# Altium PCB Jukebox PCB.PCBDOC (part 1 of 3)
Units mil, origin at the board's own origin, x right, y up, seen from the top; angles counter-clockwise.
Board outline 8310.03 x 5810.03 mil, 2 copper layers (Top Layer, Bottom Layer); 100 components, 181 nets, 737 pads, 268 vias.
Unrouted connection lines stored in the file: 109.
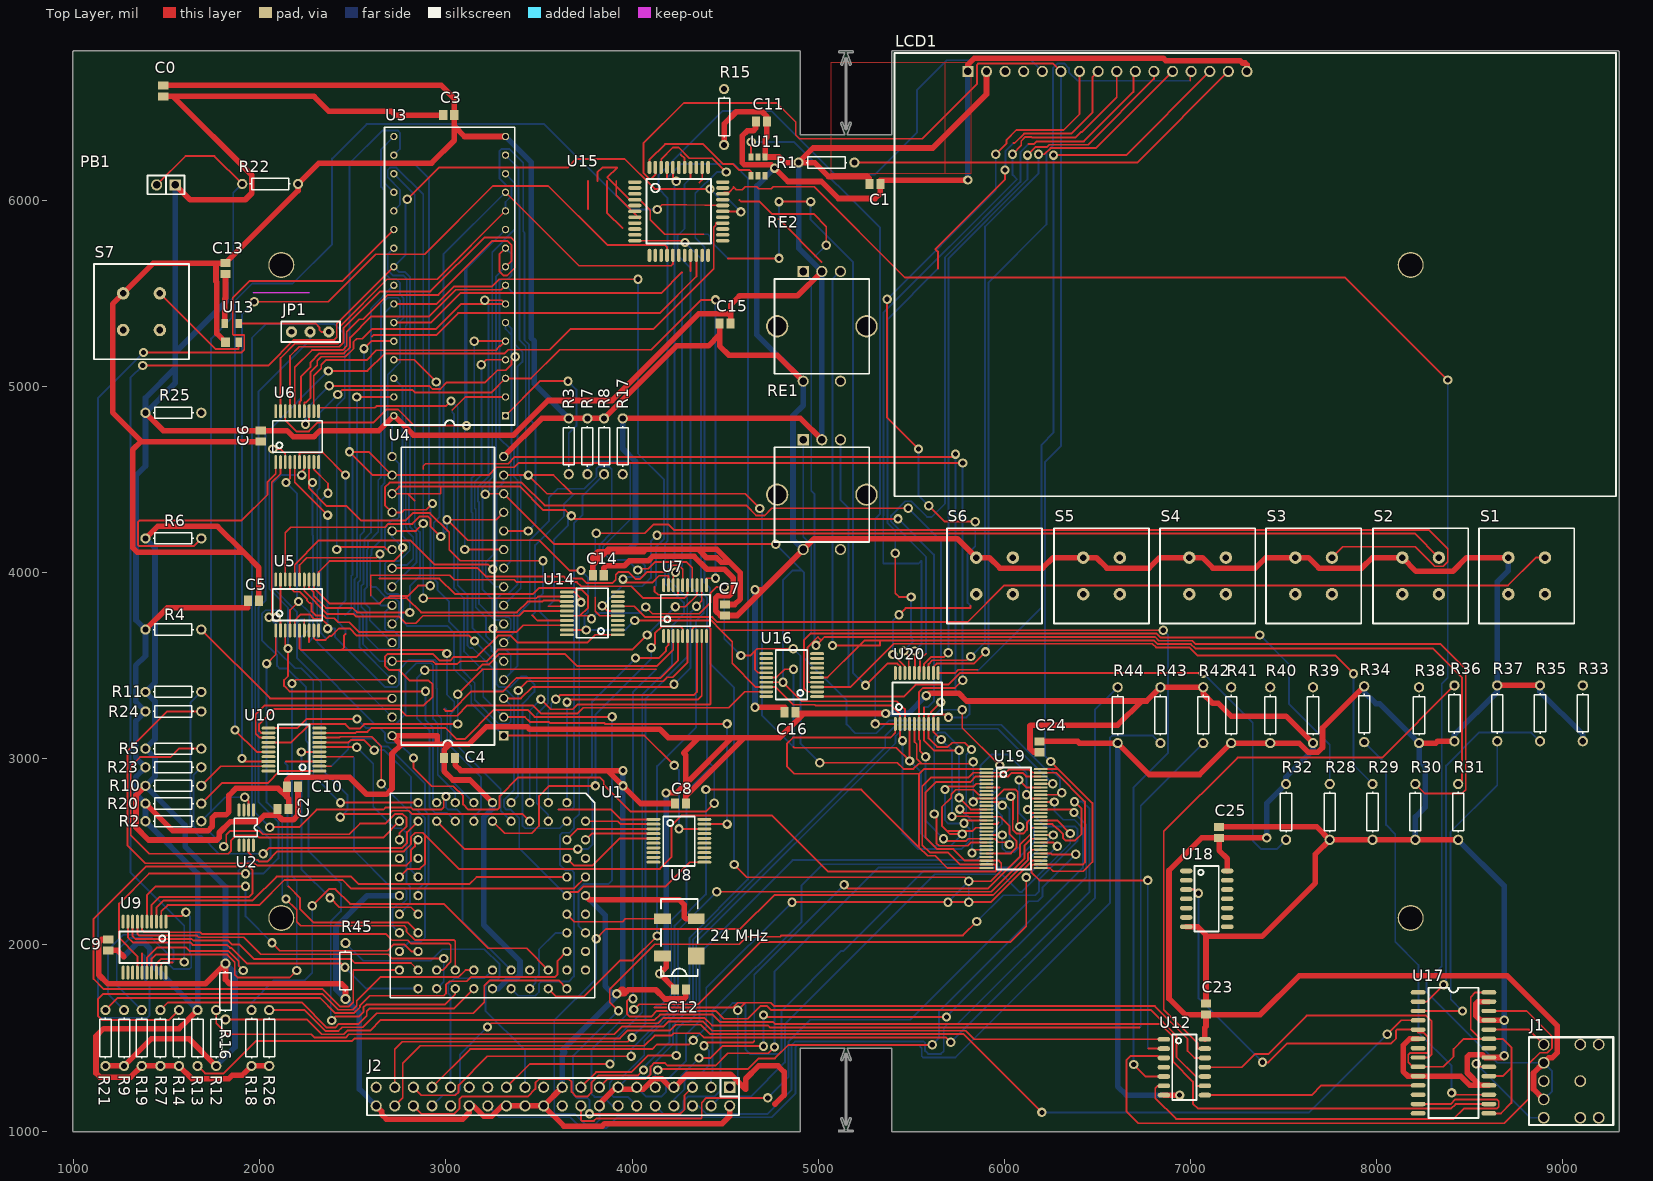
[diagram p0: Top Layer view]
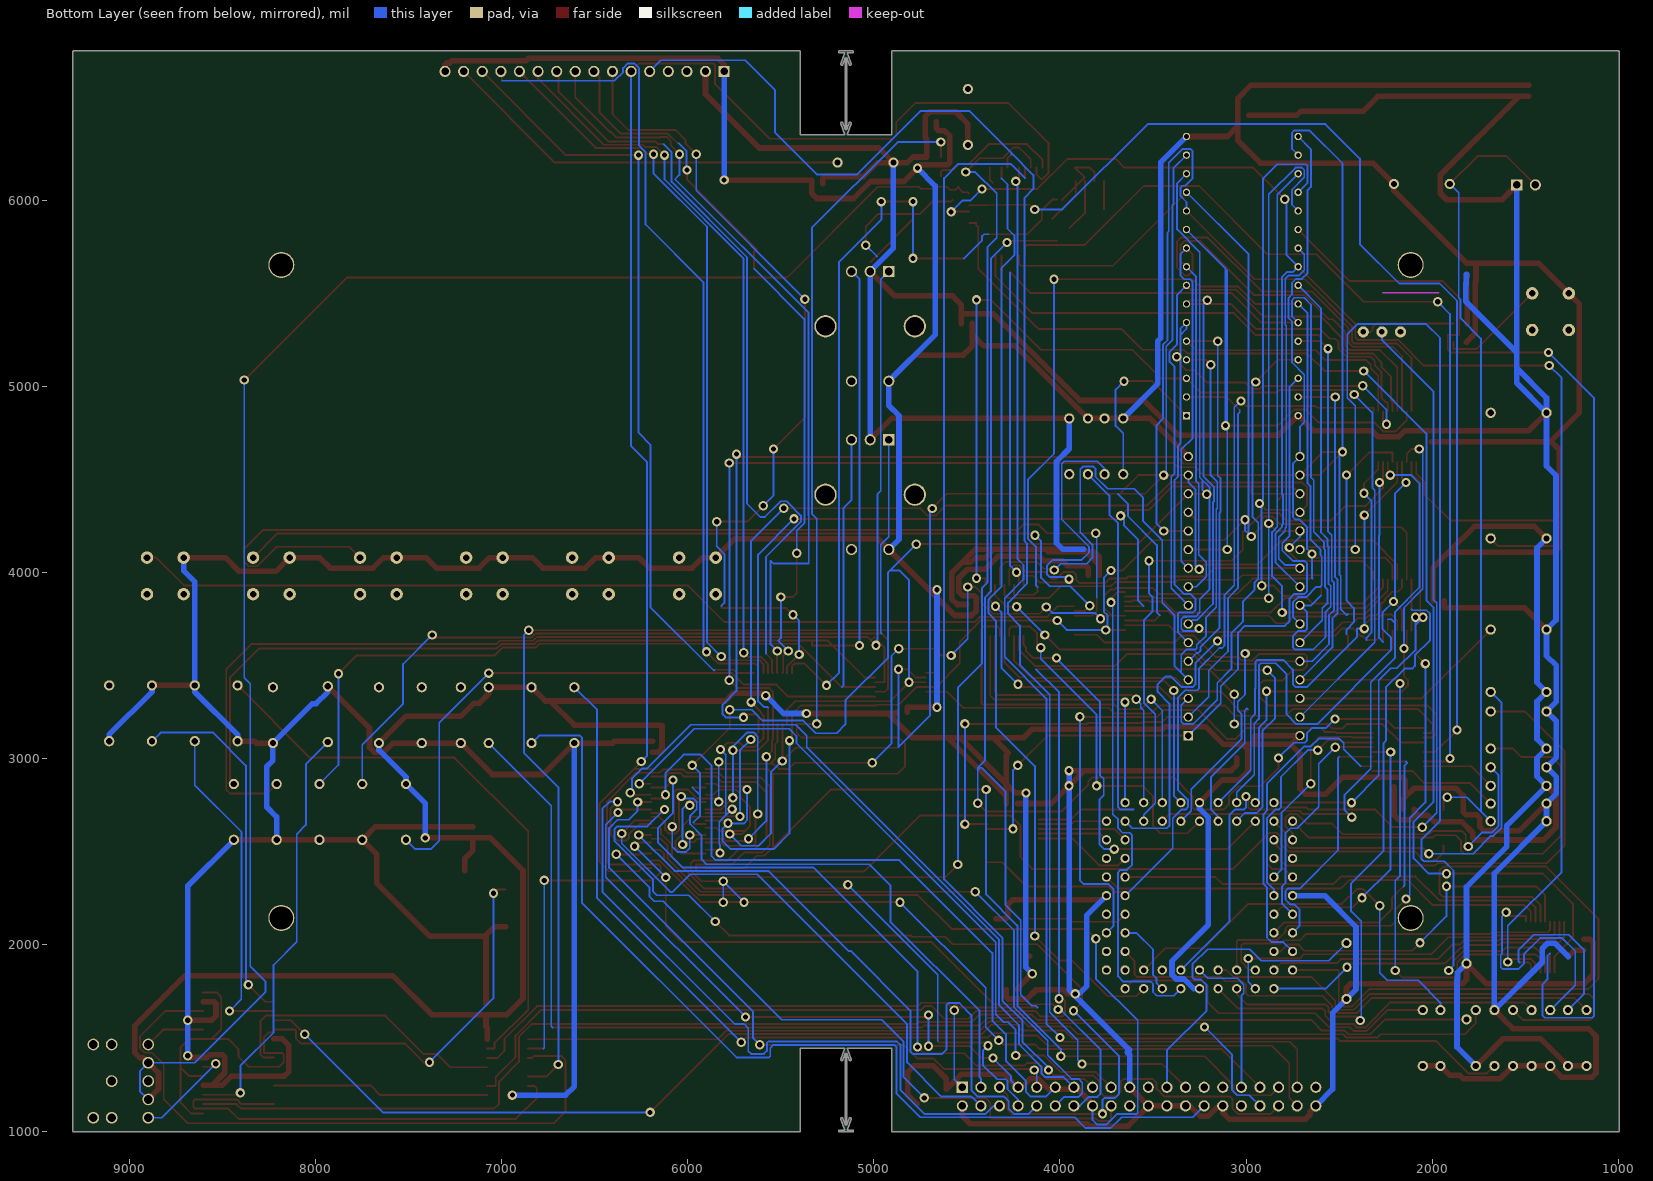
[diagram p1: Bottom Layer view, seen from below]

## Layer stack, top to bottom
Top Solder: solder mask 0.4, Solder Resist, Dk 3.5
Top Layer: signal copper 1.4
Dielectric1: dielectric 12.6, FR-4, Dk 4.8
Bottom Layer: signal copper 1.4
Bottom Solder: solder mask 0.4, Solder Resist, Dk 3.5

## Board outline
1000,994.99 cw(c1000,1000) 994.99,1000 994.99,6800 cw(c1000,6800) 1000,6805.02 4900,6805.02 cw(c4900,6800) 4905.02,6800 4905.02,6355.02 5143.04,6355.02 5122.95,6415.29 cw(c5127.71,6416.87) 5132.47,6418.46 5144.98,6380.9 5144.98,6769.1 5132.47,6731.54 cw(c5127.71,6733.13) 5122.95,6734.71 5143.04,6794.98 5115,6794.98 cw(c5115,6800) 5115,6805.02 5185,6805.02 cw(c5185,6800) 5190.02,6800 cw(c5185,6800) 5185,6794.98 5156.96,6794.98 5177.05,6734.71 cw(c5172.29,6733.13) 5177.31,6733.13 cw(c5172.29,6733.13) 5167.53,6731.54 5155.02,6769.1 5155.02,6380.9 5167.53,6418.46 cw(c5172.29,6416.87) 5177.31,6416.87 cw(c5172.29,6416.87) 5177.05,6415.29 5156.96,6355.02 5394.98,6355.02 5394.98,6800 cw(c5400,6800) 5400,6805.02 9300,6805.02 cw(c9300,6800) 9305.01,6800 9305.01,1000 cw(c9300,1000) 9300,994.99 5400,994.99 cw(c5400,1000) 5394.98,1000 5394.98,1444.98 5156.96,1444.98 5177.05,1384.71 cw(c5172.29,1383.13) 5177.31,1383.13 cw(c5172.29,1383.13) 5167.53,1381.54 5155.02,1419.1 5155.02,1030.9 5167.53,1068.46 cw(c5172.29,1066.87) 5177.31,1066.87 cw(c5172.29,1066.87) 5177.05,1065.29 5156.96,1005.01 5185,1005.01 cw(c5185,1000) 5190.02,1000 cw(c5185,1000) 5185,994.99 5115,994.99 cw(c5115,1000) 5115,1005.01 5143.04,1005.01 5122.95,1065.29 cw(c5127.71,1066.87) 5132.47,1068.46 5144.98,1030.9 5144.98,1419.1 5132.47,1381.54 cw(c5127.71,1383.13) 5122.95,1384.71 5143.04,1444.98 4905.02,1444.98 4905.02,1000 cw(c4900,1000) 4900,994.99

## Design rules (kind name [scope] priority, off if disabled: settings)
Clearance Clearance_9 [IsSMTPin vs IsFill] p1: gap=7.9
Clearance Clearance_8 [IsSMTPin vs IsVia] p2: gap=7.9
Clearance Clearance_7 [IsSMTPin vs IsSMTPin] p3: gap=7.8
Clearance Clearance_6 [IsThruPin vs IsFill] p4: gap=7.9
Clearance Clearance_5 [IsThruPin vs IsVia] p5: gap=7.9
Clearance Clearance_4 [IsThruPin vs IsSMTPin] p6: gap=7.8
Clearance Clearance_3 [IsThruPin vs IsThruPin] p7: gap=7.8
Clearance Clearance_2 [IsWire vs IsSMTPin] p8: gap=7.9
Clearance Clearance_1 [IsWire vs IsThruPin] p9: gap=7.9
Clearance [All] p10: gap=8
FabricationTestPointUsage TestPointUsage [All] p1: valid=0 allowmultiple=FALSE
FabricationTestpoint Testpoint [All] p1: side=3 testpointundercomponent=TRUE minsize=40 maxsize=100 preferedsize=60 minholesize=0 maxholesize=40 preferedholesize=32 testpointgrid=1 allowsidetop=TRUE allowsidebottom=TRUE usegrid=TRUE gridtolerance=0.01
PlaneClearance [All] p1: clearance=10
PolygonConnect [All] p1: connectstyle=Relief reliefconductorwidth=10 reliefentries=4 polygonreliefangle="90 Angle" airgapwidth=10
RoomDefinition "Jukebox Schematic" [InComponentClass('Jukebox Schematic')] p1: confinementstyle=ConfineIn formatcopy=TRUE lockcomponents=FALSE outline 315,7095 12655,7095 12655,8815 315,8815
RoutingVias [All] p1: holewidth=28 width=50 viastyle="Through Hole" minholewidth=28 minwidth=50 maxholewidth=28 maxwidth=50
SolderMaskExpansion [All] p1: expansion=2
UnpouredPolygon [All] p1: allowunpoured=FALSE
Width "Schematic Width Constraint_1" [InNet('GND')] p1: maxlimit=30 minlimit=8 preferedwidth=30
Width "Schematic Width Constraint" [InNet('VCC')] p2: maxlimit=30 minlimit=8 preferedwidth=30
Width [All] p3: maxlimit=10 minlimit=10 preferedwidth=10
26 further rules are at their usual default settings.

## Components (designator, comment, footprint, x,y, rotation, side; value= is the part's Value field where it differs from the comment)
"24 MHz" "SG-636PCE" SG636PCE 4345,1940 r90 top
C0 "Cap Pol3" C0805 1480,6590 r90 top
C1 "Cap Pol3" C0805 5305,6090 r0 top
C2 "Cap Pol3" C0805 2125,2730 r180 top
C3 "Cap Pol3" C0805 3015,6460 r0 top
C4 "Cap Pol3" C0805 3020,3005 r0 top
C5 "Cap Pol3" C0805 1965,3850 r0 top
C6 "Cap Pol3" C0805 2005,4735 r270 top
C7 "Cap Pol3" C0805 4500,3800 r270 top
C8 "Cap Pol3" C0805 4260,2760 r180 top
C9 "Cap Pol3" C0805 1185,2000 r90 top
C10 "Cap Pol3" C0805 2175,2850 r0 top
C11 "Cap Pol3" C0805 4695,6425 r180 top
C12 "Cap Pol3" C0805 4260,1760 r0 top
C13 "Cap Pol3" C0805 1815,5635 r90 top
C14 "Cap Pol3" C0805 3818.62,3987.05 r0 top
C15 "Cap Pol3" C0805 4500,5340 r180 top
C16 "Cap Pol3" C0805 4850,3250 r180 top
C23 "Cap Pol3" C0805 7085,1655 r90 top
C24 "Cap Pol3" C0805 6190,3065 r90 top
C25 "Cap Pol3" C0805 7155,2605 r90 top
J1 "PHONEJACK STEREO SW" SJ1-352 8900,1465 r0 top
J2 "IDE40" SIP2X20 4525,1235 r180 top
JP1 "3P_JP" 3P_JP 2370,5295 r180 top
LCD1 "NHD-0420DZ-FSW-FBW" 20x4Disp 5805,6695 r0 top
PB1 "SWITCH-PBNC" SIP2 1545,6085 r180 top
R1 "Res1" AXIAL-0.3 5045,6205 r180 top
R2 "Res1" AXIAL-0.3 1535,2665 r0 top
R3 "Res1" AXIAL-0.3 3660,4680 r270 top
R4 "Res1" AXIAL-0.3 1535,3695 r180 top
R5 "Res1" AXIAL-0.3 1535,3055 r0 top
R6 "Res1" AXIAL-0.3 1535,4185 r0 top
R7 "Res1" AXIAL-0.3 3760,4680 r270 top
R8 "Res1" AXIAL-0.3 3850,4680 r270 top
R9 "Res1" AXIAL-0.3 1270,1500 r90 top
R10 "Res1" AXIAL-0.3 1535,2855 r0 top
R11 "Res1" AXIAL-0.3 1535,3360 r0 top
R12 "Res1" AXIAL-0.3 1765,1500 r90 top
R13 "Res1" AXIAL-0.3 1665,1500 r90 top
R14 "Res1" AXIAL-0.3 1565,1500 r90 top
R15 "Res1" AXIAL-0.3 4495,6450 r90 top
R16 "Res1" AXIAL-0.3 1815,1750 r90 top
R17 "Res1" AXIAL-0.3 3950,4680 r270 top
R18 "Res1" AXIAL-0.3 1955,1500 r90 top
R19 "Res1" AXIAL-0.3 1365,1500 r90 top
R20 "Res1" AXIAL-0.3 1535,2760 r0 top
R21 "Res1" AXIAL-0.3 1170,1500 r90 top
R22 "Res1" AXIAL-0.3 2055,6090 r180 top
R23 "Res1" AXIAL-0.3 1535,2955 r0 top
R24 "Res1" AXIAL-0.3 1535,3255 r0 top
R25 "Res1" AXIAL-0.3 1535,4860 r0 top
R26 "Res1" AXIAL-0.3 2050,1500 r90 top
R27 "Res1" AXIAL-0.3 1465,1500 r90 top
R28 "Res1" AXIAL-0.3 7750,2715 r90 top
R29 "Res1" AXIAL-0.3 7980,2715 r90 top
R30 "Res1" AXIAL-0.3 8210,2715 r90 top
R31 "Res1" AXIAL-0.3 8440,2715 r90 top
R32 "Res1" AXIAL-0.3 7515,2715 r90 top
R33 "Res1" AXIAL-0.3 9110,3245 r90 top
R34 "Res1" AXIAL-0.3 7935,3240 r90 top
R35 "Res1" AXIAL-0.3 8880,3245 r90 top
R36 "Res1" AXIAL-0.3 8420,3245 r90 top
R37 "Res1" AXIAL-0.3 8650,3245 r90 top
R38 "Res1" AXIAL-0.3 8230,3235 r90 top
R39 "Res1" AXIAL-0.3 7660,3235 r90 top
R40 "Res1" AXIAL-0.3 7430,3235 r90 top
R41 "Res1" AXIAL-0.3 7220,3235 r90 top
R42 "Res1" AXIAL-0.3 7070,3235 r90 top
R43 "Res1" AXIAL-0.3 6840,3235 r90 top
R44 "Res1" AXIAL-0.3 6610,3235 r90 top
R45 "Res1" AXIAL-0.3 2460,1860 r90 top
RE1 "SW-ROTARY&PB" ROTENCPB 4920,4715 r0 top
RE2 "SW-ROTARY&PB" ROTENCPB 4920,5620 r0 top
S1 "SW-PB" PB_EG4791 8710,3885 r0 top
S2 "SW-PB" PB_EG4791 8140,3885 r0 top
S3 "SW-PB" PB_EG4791 7565,3885 r0 top
S4 "SW-PB" PB_EG4791 6995,3885 r0 top
S5 "SW-PB" PB_EG4791 6425,3885 r0 top
S6 "SW-PB" PB_EG4791 5850,3885 r0 top
S7 "SW-PB" PB_EG4791 1265,5305 r0 top
U1 "80C188XL" PLCCS68I 3750,2765 r270 top
U2 "MAX709" UMAX8 1965,2725 r270 top
U3 "AM28F020-200PC" DIPS32 3320,4845 r180 top
U4 "HM628128B" DIP32 3310,3125 r180 top
U5 "74ALS245" SSOP20 2085,3690 r0 top
U6 "74ALS573" SSOP20 2085,4595 r0 top
U7 "74ALS245" SSOP20 4170,3660 r0 top
U8 "74ALS573" SSOP20 4115,2675 r270 top
U9 "74ALS245" SSOP20 1495,2125 r180 top
U10 "74ALS245" SSOP20 2320,2935 r90 top
U11 "MCP4013" SOT-23-6 4715,6235 r180 top
U12 "74LCX125" "SOIC 14" 6825,1180 r0 top
U13 "MAX6816" SOT-143 1815,5240 r0 top
U14 "MAX6818" SSOP20 3923.62,3667.05 r90 top
U15 "ISPLSI1016" TQFP44 4015,6100 r0 top
U16 "74ALS245" SSOP20 4995,3335 r90 top
U17 "VS1011E" SOL-28 8225,1745 r0 top
U18 "74LCX125" "SOIC 14" 6945,2085 r0 top
U19 "74FCT16646" TSSOP56 5905,2945 r270 top
U20 "74ALS245" SSOP20 5415,3188 r0 top

## Footprints (in the part's own frame and the unit in brackets; to place one, negate y for a bottom-side part, rotate by r counter-clockwise, add the part's x,y. Pads: shape width x height; smd on the part's side, far side on the other; paste and mask are expansions set on the pad)
3P_JP [mil]
  round 60 hole 30: 1(0,0) 2(100,0) 3(200,0)
  silkscreen extent -60,-55 255,55
20x4Disp [mil]
  rect 60x60 hole 40: 1(0,0)
  round 60 hole 40: 2(100,0) 3(200,0) 4(300,0) 5(400,0) 6(500,0) 7(600,0) 8(700,0) 9(800,0) 10(900,0) 11(1000,0) 12(1100,0) 13(1200,0) 14(1300,0) 15(1400,0) 16(1500,0)
  silkscreen extent -394,-2283 3484,98
AXIAL-0.3 [mm] "Axial Device, Thru-Hole; 2 Leads; 0.3 in Pin Spacing"
  round 1.4 hole 0.85: 1(-3.81,0) 2(3.81,0)
  silkscreen extent -2.77,-0.76 2.77,0.76
C0805 [mm] "Chip Capacitor, Body 2.0x1.3mm, IPC High Density"
  rect 1.1x1.4 smd: 1(-0.75,0) 2(0.75,0)
  body extent -1.1,-0.72 1.1,0.72, height 1.4
DIP32 [mil]
  rect 50x50 hole 35: 1(0,0)
  round 50 hole 35: 2(0,-100) 3(0,-200) 4(0,-300) 5(0,-400) 6(0,-500) 7(0,-600) 8(0,-700) 9(0,-800) 10(0,-900) 11(0,-1000) 12(0,-1100) 13(0,-1200) 14(0,-1300) 15(0,-1400) 16(0,-1500) 17(600,-1500) 18(600,-1400) 19(600,-1300) 20(600,-1200) 21(600,-1100) 22(600,-1000) 23(600,-900) 24(600,-800) 25(600,-700) 26(600,-600) 27(600,-500) 28(600,-400) 29(600,-300) 30(600,-200) 31(600,-100) 32(600,0)
  silkscreen extent 50,-1550 550,50
DIPS32 [mil]
  rect 40x40 hole 25: 1(0,0)
  round 40 hole 25: 2(0,-100) 3(0,-200) 4(0,-300) 5(0,-400) 6(0,-500) 7(0,-600) 8(0,-700) 9(0,-800) 10(0,-900) 11(0,-1000) 12(0,-1100) 13(0,-1200) 14(0,-1300) 15(0,-1400) 16(0,-1500) 17(600,-1500) 18(600,-1400) 19(600,-1300) 20(600,-1200) 21(600,-1100) 22(600,-1000) 23(600,-900) 24(600,-800) 25(600,-700) 26(600,-600) 27(600,-500) 28(600,-400) 29(600,-300) 30(600,-200) 31(600,-100) 32(600,0)
  silkscreen extent -50,-1550 650,50
PB_EG4791 [mm]
  round 1.7 hole 0.9: 1(0,5) 2(5,5) 3(0,0) 4(5,0)
  silkscreen extent -4,-4 9,9
PLCCS68I [mil]
  round 50 hole 30: 1(0,-100) 2(100,-100) 3(0,-200) 4(100,-200) 5(0,-300) 6(100,-300) 7(0,-400) 8(100,-400) 9(0,-500) 10(100,-500) 11(0,-600) 12(100,-600) 13(0,-700) 14(100,-700) 15(0,-800) 16(100,-800) 17(0,-900) 18(100,-1000) 19(100,-900) 20(200,-1000) 21(200,-900) 22(300,-1000) 23(300,-900) 24(400,-1000) 25(400,-900) 26(500,-1000) 27(500,-900) 28(600,-1000) 29(600,-900) 30(700,-1000) 31(700,-900) 32(800,-1000) 33(800,-900) 34(900,-1000) 35(1000,-900) 36(900,-900) 37(1000,-800) 38(900,-800) 39(1000,-700) 40(900,-700) 41(1000,-600) 42(900,-600) 43(1000,-500) 44(900,-500) 45(1000,-400) 46(900,-400) 47(1000,-300) 48(900,-300) 49(1000,-200) 50(900,-200) 51(1000,-100) 52(900,0) 53(900,-100) 54(800,0) 55(800,-100) 56(700,0) 57(700,-100) 58(600,0) 59(600,-100) 60(500,0) 61(500,-100) 62(400,0) 63(400,-100) 64(300,0) 65(300,-100) 66(200,0) 67(200,-100) 68(100,0)
  silkscreen extent -50,-1050 1050,50
ROTENCPB [mil]
  rect 60x60 hole 42: 1(0,0)
  round 60 hole 42: 2(100,0) 3(200,0) 4(200,-590) 5(0,-590)
  round 120 hole 100: ""(-140,-295) ""(340,-295)
  silkscreen extent -155,-550 355,-40
SG636PCE [mm]
  rect 2.3x2.3 smd: 1(0,0)
  rect 1.5x2.3 smd: 2(5.1,0) 3(5.1,4.6) 4(0,4.6)
  silkscreen extent -2.7,-0.2 7.8,4.8
SIP2 [mil]
  rect 60x60 hole 40: 1(0,0)
  round 60 hole 40: 2(100,0)
  silkscreen extent -50,-50 150,50
SIP2X20 [mil]
  rect 60x60 hole 40: 1(0,0)
  round 60 hole 40: 2(0,100) 3(100,0) 4(100,100) 5(200,0) 6(200,100) 7(300,0) 8(300,100) 9(400,0) 10(400,100) 11(500,0) 12(500,100) 13(600,0) 14(600,100) 15(700,0) 16(700,100) 17(800,0) 18(800,100) 19(900,0) 20(900,100) 21(1000,0) 22(1000,100) 23(1100,0) 24(1100,100) 25(1200,0) 26(1200,100) 27(1300,0) 28(1300,100) 29(1400,0) 30(1400,100) 31(1500,0) 32(1500,100) 33(1600,0) 34(1600,100) 35(1700,0) 36(1700,100) 37(1800,0) 38(1800,100) 39(1900,0) 40(1900,100)
  silkscreen extent -50,-50 1950,150
SJ1-352 [mm]
  round 1.6 hole 1.2: A(0,-10) B(0,-7.5) C(0,-2.5) D(0,0) E(5,-5) ""(0,-5) ""(5,-10) ""(5,0) ""(7.5,-10) ""(7.5,0)
  silkscreen extent -2,-11 9.5,1
"SOIC 14" [mm]
  oval 1.7x0.65 smd: 1(0.85,7.945) 2(0.85,6.675) 3(0.85,5.405) 4(0.85,4.135) 5(0.85,2.865) 6(0.85,1.595) 7(0.85,0.325) 8(6.45,0.325) 9(6.45,1.595) 10(6.45,2.865) 11(6.45,4.135) 12(6.45,5.405) 13(6.45,6.675) 14(6.45,7.945)
  silkscreen extent 2,-0.33 5.3,8.6
SOL-28 [mil]
  oval 80x24 smd: 1(0,0) 2(0,-50) 3(0,-100) 4(0,-150) 5(0,-200) 6(0,-250) 7(0,-300) 8(0,-350) 9(0,-400) 10(0,-450) 11(0,-500) 12(0,-550) 13(0,-600) 14(0,-650) 15(380,-650) 16(380,-600) 17(380,-550) 18(380,-500) 19(380,-450) 20(380,-400) 21(380,-350) 22(380,-300) 23(380,-250) 24(380,-200) 25(380,-150) 26(380,-100) 27(380,-50) 28(380,0)
  silkscreen extent 55,-675 325,25
SOT-23-6 [mil]
  rect 26x40 smd: 1(0,0) 2(37.5,0) 3(75,0) 4(75,102) 5(37.5,102) 6(0,102)
SOT-143 [mil]
  rect 50x50 smd: 1(0,0)
  rect 35x50 smd: 2(70,0) 3(70,100) 4(-5,100)
SSOP20 [mm]
  oval 0.4x1.9 smd: 1(0,0) 2(0.65,0) 3(1.3,0) 4(1.95,0) 5(2.6,0) 6(3.25,0) 7(3.9,0) 8(4.55,0) 9(5.2,0) 10(5.85,0) 11(5.85,6.95) 12(5.2,6.95) 13(4.55,6.95) 14(3.9,6.95) 15(3.25,6.95) 16(2.6,6.95) 17(1.95,6.95) 18(1.3,6.95) 19(0.65,6.95) 20(0,6.95)
  silkscreen extent -0.4,1.35 6.35,5.65
TQFP44 [mm]
  oval 1.8x0.5 smd: 1(0,0) 2(0,-0.8) 3(0,-1.6) 4(0,-2.4) 5(0,-3.2) 6(0,-4) 7(0,-4.8) 8(0,-5.6) 9(0,-6.4) 10(0,-7.2) 11(0,-8) 23(12,-8) 24(12,-7.2) 25(12,-6.4) 26(12,-5.6) 27(12,-4.8) 28(12,-4) 29(12,-3.2) 30(12,-2.4) 31(12,-1.6) 32(12,-0.8) 33(12,0)
  oval 0.5x1.8 smd: 12(2,-10) 13(2.8,-10) 14(3.6,-10) 15(4.4,-10) 16(5.2,-10) 17(6,-10) 18(6.8,-10) 19(7.6,-10) 20(8.4,-10) 21(9.2,-10) 22(10,-10) 34(10,2) 35(9.2,2) 36(8.4,2) 37(7.6,2) 38(6.8,2) 39(6,2) 40(5.2,2) 41(4.4,2) 42(3.6,2) 43(2.8,2) 44(2,2)
  silkscreen extent 1.6,-8.4 10.4,0.4
TSSOP56 [mm]
  oval 0.3x1.9 smd: 1(0,0) 2(0.5,0) 3(1,0) 4(1.5,0) 5(2,0) 6(2.5,0) 7(3,0) 8(3.5,0) 9(4,0) 10(4.5,0) 11(5,0) 12(5.5,0) 13(6,0) 14(6.5,0) 15(7,0) 16(7.5,0) 17(8,0) 18(8.5,0) 19(9,0) 20(9.5,0) 21(10,0) 22(10.5,0) 23(11,0) 24(11.5,0) 25(12,0) 26(12.5,0) 27(13,0) 28(13.5,0) 29(13.5,7.4) 30(13,7.4) 31(12.5,7.4) 32(12,7.4) 33(11.5,7.4) 34(11,7.4) 35(10.5,7.4) 36(10,7.4) 37(9.5,7.4) 38(9,7.4) 39(8.5,7.4) 40(8,7.4) 41(7.5,7.4) 42(7,7.4) 43(6.5,7.4) 44(6,7.4) 45(5.5,7.4) 46(5,7.4) 47(4.5,7.4) 48(4,7.4) 49(3.5,7.4) 50(3,7.4) 51(2.5,7.4) 52(2,7.4) 53(1.5,7.4) 54(1,7.4) 55(0.5,7.4) 56(0,7.4)
  silkscreen extent -0.2,1.4 13.7,6.1
UMAX8 [mm]
  oval 1.8x0.4 smd: 1(0,0) 2(0,-0.65) 3(0,-1.3) 4(0,-1.95) 5(4.8,-1.95) 6(4.8,-1.3) 7(4.8,-0.65) 8(4.8,0)
  silkscreen extent 1.15,-2.6 3.65,0.5

## Part data
"24 MHz": library part OSC, "TTL/CMOS Oscillator"
C0 C1 C2 C3 C4 C5 C6 C7 C8 C9 C10 C11 C12 C13 C14 C15 C16 C23 C24 C25: "Polarized Capacitor (Surface Mount)"
J1: "3.5mm Stereo Jack with Switches"
J2: "40-Pin IDE Connector"
LCD1: library part LCDBL16PIN, "Single E LCD with Backlight"
PB1: "Normally Closed Pushbutton Switch"
R1 R2 R3 R4 R5 R6 R7 R8 R9 R10 R11 R12 R13 R14 R15 R16 R17 R18 R19 R20 R21 R22 R23 R24 R25 R26 R27 R28 R29 R30 R31 R32 R33 R34 R35 R36 R37 R38 R39 R40 R41 R42 R43 R44 R45: "Resistor"
RE1 RE2: "Rotary Encoder with Built-In Push Button"
S1 S2 S3 S4 S5 S6 S7: "Switch"
U1: "Intel 80188 Microprocessor"
U2: "Maxim Power-On Reset"
U3: library part UNIROM, "Universal EPROM/EEROM Socket"
U4: library part UNIRAM, "Universal RAM Socket"
U5 U7 U9 U10 U16 U20: "Octal Bus Transceiver"
U6 U8: "Octal Transparent Latch"
U13: "Single Switch Debouncer"
U14: "Octal Switch Debouncer"
U15: "In-System Programmable High Density CPLD"
U19: "16-Bit Bus Transceiver/Register"

## Free pads (board coordinates)
  round 140 hole 125: 1(2115,2145) 2(2115,5655) 3(8185,2145) 4(8185,5655)

## Via types
v1: diameter 50, hole 28, Top Layer to Bottom Layer, 268 vias

## Nets (pads, with @x,y where several pads share a name; then routed paths per layer and width w, separated by ;. In a path a pad name is that pad's centre, name@x,y a point inside that pad or via, vN(x,y) a via of type N, cw(c..) or ccw(c..) an arc to the next point about the centre after c; other vN are vias at no path point)
A0: U3.12 U4.12 U6.19 | length 4557.9
  Top Layer w10: U6.19@2110.59,4868.62 2110.59,5153.59 2190,5233 2420,5233 2431,5244 2431,5326 2683,5578 2953,5578 U3.12@3320,5945 ; U4.12@3310,4225 v1(3442,4225)
  Bottom Layer w10: U3.12@3320,5945 3320,5993 3352.9,6025.9 3352.9,6069.1 3342,6080 3327,6080 3287,6120 3287,6265 3300,6278 3340,6278 3415,6203 3415,5835 3422,5828 3422,5250 3446.9,5225.1 3446.9,4828.1 3481,4794 3481,4264 v1(3442,4225)
A1: U3.11 U4.11 U6.18 | length 3992.1
  Top Layer w10: U6.18@2136.18,4868.62 2136.18,4820 2196.18,4760 2263,4760 2311,4808 2611.53,4808 2681.43,4877.9 2742.1,4877.9 2829,4791 v1(3110,4791) ; v1(3101,4125) U4.11@3310,4125
  Bottom Layer w10: v1(3101,4125) 3101,5626 3110,5626 ; v1(3110,4791) 3110,5626 ; U3.11@3320,5845 3110,5635 3110,5626
A2: U3.10 U4.10 U6.17 | length 4035.7
  Top Layer w10: U6.17@2161.77,4868.62 2161.77,5165.27 2211.5,5215 2427.46,5215 2449,5236.54 2449,5315.1 2646,5512.1 2916.63,5512.1 3207.53,5803 3348,5803 3371,5780 3371,5640 3328,5597 3310,5597 3287,5620 3287,5712 U3.10@3320,5745
  Bottom Layer w10: U4.10@3310,4025 3348,4063 3348,4663 3287.1,4723.9 3287.1,5565.1 3300,5578 3331,5578 3353,5600 3353,5712 U3.10@3320,5745
A3: U3.9 U4.9 U6.16 | length 3694.2
  Top Layer w10: U6.16@2187.36,4868.62 2187.36,5104.36 2280,5197 2444,5197 2467,5220 2467,5296.58 2533.57,5363.15 2555.15,5363.15 2686.1,5494.1 2959.1,5494.1 3248.5,5783.5 3329.5,5783.5 3353,5760 3353,5678 U3.9@3320,5645
  Bottom Layer w10: U4.9@3310,3925 3268.1,3925 3214,3979.1 3214,4055.82 3254.1,4095.92 3254.1,4479.23 3269.1,4494.23 3269.1,5594.1 U3.9@3320,5645
A4: U3.8 U4.8 U6.15 | length 3350.7
  Top Layer w10: U6.15@2212.95,4868.62 2212.95,4917.95 2220.29,4925.29 2220.29,5054.29 2272.56,5106.56 2272.56,5131.56 2320,5179 2451.46,5179 2485,5212.54 2485,5264 2599,5378 2909,5378 3052,5521 3296,5521 U3.8@3320,5545
  Bottom Layer w10: U4.8@3310,3825 3401.9,3916.9 3401.9,4516.9 3384,4534.8 3384,5106.96 3410.9,5133.86 3410.9,5188.1 3370.9,5228.1 3370.9,5494.1 U3.8@3320,5545
A5: U3.7 U4.7 U6.14 | length 3427.8
  Top Layer w10: U6.14@2238.54,4868.62 2238.54,4915.54 2248.54,4915.54 2271,4938 2271,5078 2308,5115 2308,5140 2329,5161 2458.91,5161 2503,5205.09 2503,5241 2520,5258 2551,5258 2604,5311 2946.96,5311 3080.96,5445 U3.7@3320,5445 3300,5465 v1(3208,5465)
  Bottom Layer w10: v1(3208,5465) 3228,5445 3228,4516.9 3173,4461.9 3173,4383.56 3178,4378.56 3178,3930.1 3178.1,3930 3178.1,3832.44 3264.24,3746.3 3288.7,3746.3 U4.7@3310,3725
A6: U3.6 U4.6 U6.13 | length 3456.6
  Top Layer w10: v1(2245,4798) 2264.13,4817.13 U6.13@2264.13,4868.62 ; v1(2373,5005) 2910,5005 2927,4988 2970,4988 3005,5023 3211,5023 3277,5089 3322,5089 3353,5120 3353,5142 v1(3372,5161)
  Bottom Layer w10: v1(2245,4798) 2245,4877 v1(2373,5005) ; U4.6@3310,3625 3365.9,3680.9 3365.9,3780.9 3359.8,3787 3285,3787 3272,3800 3272,3860 3299,3887 3335,3887 3383.9,3935.9 3383.9,4498.9 3366,4516.8 3366,4681 3352.9,4694.1 3352.9,5161 3352.9,5180.1 ; v1(3372,5161) 3352.9,5180.1 ; 3352.9,5180.1 3352.9,5278 ; 3352.9,5278 3352.9,5312.1 U3.6@3320,5345 3320,5310.9 3352.9,5278
A7: U3.5 U4.5 U6.12 | length 3282.9
  Top Layer w10: U6.12@2289.72,4868.62 2289.72,5059.14 2329.51,5098.92 2329.51,5117.68 2354.82,5143 2573,5143 2625.9,5195.9 3270.9,5195.9 3274.19,5199.19 3274.19,5203.86 3290,5219.66 3294.66,5219.66 U3.5@3320,5245 v1(3152,5245)
  Bottom Layer w10: v1(3152,5245) 3152,4522.25 3137,4507.25 3137,4328 3142,4323 3142,3883.2 3142.1,3883.1 3142.1,3704 3245.55,3600.55 3245.55,3580 3256.45,3569.1 3265.9,3569.1 U4.5@3310,3525
A8: U3.27 U4.27 U7.18 | length 5530.8
  Top Layer w10: U3.27@2720,5345 2919,5345 3077,5503 4156,5503 4268,5615 ; U7.18@4221.18,3933.62 4221.18,3990.18 v1(4234,4003)
  Bottom Layer w10: U4.27@2710,3625 2590,3745 2590,3809 2563,3836 2563,3911.47 2575,3923.47 2575,4123.1 2581,4129.1 2581,4165 2636.1,4220.1 2636.1,4498.9 2651.1,4513.9 2651.1,5442.1 2687,5478 2740,5478 2752.9,5465.1 2752.9,5377.9 U3.27@2720,5345 ; v1(4234,4003) 4268,4037 4268,5615
A9: U3.26 U4.26 U7.17 | length 5199.2
  Top Layer w10: U3.26@2720,5445 2950,5445 3044,5539 3248,5539 3287,5578 v1(4032,5578) ; 4120,3924 4120,3902 4140,3882 4246.77,3882 U7.17@4246.77,3933.62
  Bottom Layer w10: U4.26@2710,3725 2748,3763 2748,3841.1 2720,3869.1 2676.9,3869.1 2621.86,3924.14 2601.22,3924.14 2593,3932.36 2593,4090 2599.93,4096.93 2599.93,4126 2654.1,4180.17 2654.1,4465.9 2669.1,4480.9 2669.1,5394.1 U3.26@2720,5445 ; v1(4032,5578) 4032,4640.92 4172,4500.92 4172,4184 4129,4141 4129,3933 4120,3924
A10: U3.23 U4.23 U7.16 | length 3689.5
  Top Layer w10: U4.23@2710,4025 3170,4025 3214,3981 3633,3981 3645,3969 3732,3969 3755,3946 3896,3946 3912.83,3962.83 3912.83,3990 3926.83,4004 3982,4004 4020,3966 4041.28,3966 4079.28,4004 4181,4004 4218,4041 4251.36,4041 4272.36,4020 U7.16@4272.36,3933.62
  Bottom Layer w10: U4.23@2710,4025 2727.78,4042.78 2791.37,4042.78 2823.9,4075.31 2823.9,4192 2788.9,4227 2788.9,4238.9 2783.9,4243.9 2783.9,5327.17 2788.9,5332.17 2788.9,5580.61 2771.41,5598.09 2713.91,5598.09 2687,5625 2687,5712 U3.23@2720,5745
A11: U3.25 U4.25 U7.15 | length 4533.5
  Top Layer w10: 2596,3879 2596,3986 2597.1,3987.1 3019.9,3987.1 3044,3963 3366,3963 3379,3950 3704,3950 3726,3928 3997,3928 4061,3864 4281.95,3864 4297.95,3880 U7.15@4297.95,3933.62
  Bottom Layer w10: 2596,3879 2650,3825 U4.25@2710,3825 2672,3787 2672,3700 2685,3687 2721,3687 2748,3660 2748,3600 2735,3587 2640,3587 2572,3655 2572,3790.47 2545,3817.47 2545,3929.47 2557,3941.47 2557,4141.1 2563,4147.1 2563,4183 2597,4217 2597,5422 U3.25@2720,5545
A12: U3.4 U4.4 U7.14 | length 4591.1
  Top Layer w10: v1(3190,5118) 3217,5145 U3.4@3320,5145 ; v1(4031,4015) 4038,4022 4087,4022 4124,4059 4291.54,4059 4323.54,4027 U7.14@4323.54,3933.62
  Bottom Layer w10: v1(3190,5118) 3190,4524 3155,4489 3155,4346 3160,4341 3160,3916.1 3160.1,3916 3160.1,3814.9 3215,3760 3215,3663 3265,3613 3265,3594 3272,3587 3321,3587 3348,3560 3348,3463 ; U4.4@3310,3425 3348,3463 ; v1(4031,4015) 3997,4049 3856.93,4049 3825.93,4080 3825.93,4151.93 3891,4217 3891,4557 3877,4571 3820,4571 3809,4560 3809,4517 3744,4452 3600,4452 3554,4406 3554,4280 3450,4176 3450,3839 3384,3773 3384,3499 3348,3463
A13: U3.28 U4.28 U7.13 | length 3836.9
  Top Layer w10: v1(2559,5205) 2599,5245 U3.28@2720,5245 ; U4.28@2710,3525 2929,3525 2944,3510 3061,3510 3076,3525 3218,3525 3280,3587 4002,3587 v1(4081,3666) ; v1(4233,3818) 4287.13,3818 4349.13,3880 U7.13@4349.13,3933.62
  Bottom Layer w10: v1(2559,5205) 2559,4221 2539,4201 2539,3959.47 2527,3947.47 2527,3799.47 2554,3772.47 2554,3616 2645,3525 U4.28@2710,3525 ; v1(4081,3666) v1(4233,3818)
A14: U3.29 U4.3 U7.12 | length 4033.1
  Top Layer w10: U3.29@2720,5145 2829,5145 v1(2948,5026) ; U4.3@3310,3325 3403,3325 3463.8,3385.8 4210.8,3385.8 v1(4226,3401) ; v1(4346,3820) 4374.72,3848.72 U7.12@4374.72,3933.62
  Bottom Layer w10: v1(2948,5026) 2966,5008 2966,4301 2934,4269 2934,3969 2954,3949 2954,3909 3016,3847 3016,3739.35 3079,3676.35 3079,3483.54 3154.69,3407.85 3154.69,3317.31 3285,3187 3334.9,3187 3347.9,3200 3347.9,3287.1 U4.3@3310,3325 ; v1(4226,3401) 4315,3490 4315,3789 v1(4346,3820)
A15: U3.3 U4.31 U7.11 | length 5779.7
  Top Layer w10: v1(2418,4958) 2443,4983 2820,4983 2833,4970 3245,4970 U3.3@3320,5045 3457,5045 3611,5199 4104,5199 4372,5467 v1(4449,5467) ; U7.11@4400.32,3933.62 4400.32,3971 v1(4449,3971)
  Bottom Layer w10: v1(2418,4958) 2321,4861 2321,4457 2308,4444 2308,3627 U4.31@2710,3225 ; v1(4449,3971) v1(4449,5467)
A16: U3.2 U4.2 U8.19 | length 3956.6
  Top Layer w10: 3034,4875 3104,4945 U3.2@3320,4945 ; U4.2@3310,3225 3423.94,3225 3449.94,3199 3552,3199 3558,3193 3850,3193 3855,3188 v1(4511,3188) ; U8.19@4388.62,2649.41 v1(4511,2649.41)
  Bottom Layer w10: 3034,4875 3034,4863 3044,4853 3044,3916.72 3097,3863.72 3097,3578 3200,3475 3200,3335 U4.2@3310,3225 ; v1(4511,2649.41) v1(4511,3188)
A17: U3.30 U4.1 U8.18 | length 3941.7
  Top Layer w10: U4.1@3310,3125 4067,3125 v1(4227,2965) ; v1(4252,2623.82) U8.18@4388.62,2623.82
  Bottom Layer w10: U3.30@2720,5045 2765.9,4999.1 2765.9,4199.1 2805,4160 2805,4120 2749,4064 2686,4064 2672,4050 2672,3900 2684.9,3887.1 2740,3887.1 2766,3861.1 2766,3740 2791,3715 3007,3715 3043,3679 3043,3483 3136,3390 3136,3299 U4.1@3310,3125 ; v1(4227,2965) 4252,2940 v1(4252,2623.82)
CPU_A8: U1.16 U7.2 | length 2292.6
  Top Layer w10: U1.16@2950,2665 3100,2515 v1(3708,2515) ; v1(4019,3542) 4019.46,3541.54 4144.54,3541.54 4183,3580 4183,3599.41 4195.59,3612 U7.2@4195.59,3660
  Bottom Layer w10: v1(3708,2515) 3763,2515 3788,2540 3788,2781 3765,2804 3765,2893 3785,2913 3785,3308 v1(4019,3542)
CPU_A9: U1.14 U7.3 | length 2458.2
  Top Layer w10: v1(2886,3476) 3164.76,3476 3195.76,3507 3228.9,3507 3284.9,3563 3640,3563 3703,3500 4135.9,3500 4221.18,3585.29 U7.3@4221.18,3660
  Bottom Layer w10: v1(2886,3476) 2843.74,3433.74 2843.74,3219.26 2912,3151 2912,2740 2942.9,2709.1 3005.9,2709.1 U1.14@3050,2665
CPU_A10: U1.12 U7.4 | length 2215
  Top Layer w10: 2990,3267 3000,3257 3030,3257 3136,3363 3307,3363 3379,3435 4153.99,3435 4246.77,3527.78 U7.4@4246.77,3660
  Bottom Layer w10: 2990,3267 2995,3272 3007,3260 3007,3084 3187.9,2903.1 3187.9,2727 3150,2689.1 U1.12@3150,2665
CPU_A11: U1.10 U7.5 | length 1940.1
  Top Layer w10: U1.10@3250,2665 3315,2600 3460,2600 3500,2640 3500,2800 3555,2855 v1(3803,2855) ; v1(4103,3598) 4123,3618 4123,3674 4160,3711 4261.36,3711 4272.36,3700 U7.5@4272.36,3660
  Bottom Layer w10: v1(3803,2855) 3803,3238 4103,3538 v1(4103,3598)
CPU_A12: U1.7 U7.6 | length 1733.2
  Top Layer w10: v1(3388,3368) 3437,3417 4166.62,3417 4188.62,3439 4219.59,3439 4297.95,3517.36 U7.6@4297.95,3660
  Bottom Layer w10: U1.7@3350,2765 3388,2803 v1(3388,3368)
CPU_A13: U1.5 U7.7 | length 2077.5
  Top Layer w10: v1(3510,3320) 3563.5,3266.5 3681.5,3266.5 3708,3293 4418.5,3293 4422,3296.5 4422,3700 4411,3711 4334.54,3711 4323.54,3700 U7.7@4323.54,3660
  Bottom Layer w10: U1.5@3450,2765 3450,3260 v1(3510,3320)
CPU_A14: U1.3 U7.8 | length 1647.3
  Top Layer w10: v1(3590,3320) 3613,3343 4332.13,3343 4349.13,3360 U7.8@4349.13,3660
  Bottom Layer w10: U1.3@3550,2765 3550,3260 3566,3276 3566,3296 v1(3590,3320)
CPU_A15: U1.1 U7.9 | length 1599.2
  Top Layer w10: v1(3650,3305) 3665,3320 4354.72,3320 4374.72,3340 U7.9@4374.72,3660
  Bottom Layer w10: U1.1@3650,2765 v1(3650,3305)
CPU_A16: U1.68 U8.2 | length 371.5
  Top Layer w10: U1.68@3750,2665 3924,2665 3939.59,2649.41 U8.2@4115,2649.41
CPU_A17: U1.67 U8.3 | length 489.4
  Top Layer w10: U1.67@3650,2565 3708.82,2623.82 U8.3@4115,2623.82
CPU_A18: U1.66 U8.4 | length 378.8
  Top Layer w10: U1.66@3750,2565 3783.23,2598.23 U8.4@4115,2598.23
CPU_A19: U1.65 U8.5 | length 541
  Top Layer w10: U1.65@3650,2465 3687.9,2427.1 3787.9,2427.1 3933.44,2572.64 U8.5@4115,2572.64
CPU_AD0: U1.17 U5.2 U6.2 | length 2571.1
  Top Layer w10: v1(2049,3761) 2064,3776 2064,4485.77 2110.59,4532.36 U6.2@2110.59,4595 ; v1(2089,3761) 2110.59,3739.41 U5.2@2110.59,3690 ; v1(2433,2765) U1.17@2850,2765
  Bottom Layer w10: v1(2049,3761) 2089,3721 ; v1(2089,3761) 2089,3721 ; v1(2433,2765) 2287,2911 2287,3423 2222.95,3487.05 2189.58,3487.05 2089,3587.63 2089,3721
CPU_AD1: U1.15 U5.3 U6.3 | length 2951
  Top Layer w10: v1(2069,4665) 2111.18,4665 2136.18,4640 U6.3@2136.18,4595 ; U5.3@2136.18,3690 2136.18,3608.45 v1(2151,3593.64) 2151,3445 2130,3424 2130,3392 2159,3363 v1(2889.5,3363)
  Bottom Layer w10: v1(2069,4665) 2050,4646 2050,3913.54 2151,3812.54 v1(2151,3593.64) ; v1(2889.5,3363) 2889.5,3209.5 2930,3169 2930,2785 U1.15@2950,2765
CPU_AD2: U1.13 U5.4 U6.4 | length 3194.5
  Top Layer w10: v1(2140,4485.77) 2161.77,4507.54 U6.4@2161.77,4595 ; U5.4@2161.77,3690 2161.77,3800 v1(2207.39,3845.61)
  Bottom Layer w10: v1(2140,4485.77) 2200,4425.77 2200,3853 v1(2207.39,3845.61) 2267,3786 2267,3699 2221,3653 2221,3584 2618,3187 2729,3187 2782,3240 2782,3456 2840,3514 2920,3514 2931,3503 2931,3215 2956,3190 2956,2914 3050,2820 U1.13@3050,2765
CPU_AD3: U1.11 U5.5 U6.5 | length 2949.5
  Top Layer w10: U5.5@2187.36,3690 2187.36,3743.72 2220,3776.36 2266.83,3776.36 2290.16,3753.03 2330.97,3753.03 2364,3720 v1(2364,3700) ; U6.5@2187.36,4595 2187.36,4564 2187,4564 2187,4487 v1(2364,4310)
  Bottom Layer w10: v1(2364,4310) v1(2364,3700) 2365,3701 2403,3701 2403,3656.1 2672,3387.1 2735.1,3387.1 2748,3400 2748,3480 2800,3532 2940,3532 2949,3523 2949,3380.06 2952,3377.06 2952,3240 2974.9,3217.1 2974.9,2940.1 U1.11@3150,2765
CPU_AD4: U1.8 U5.6 U6.6 | length 3288.5
  Top Layer w10: U5.6@2212.95,3690 2212.95,3592.64 2219.59,3586 2440,3586 ; U6.6@2212.95,4595 2212.95,4646 2339,4646 v1(2459.62,4525.38) ; 2459.62,3670.62 2452,3663 2452,3598 2440,3586 ; v1(3005,3566) 2985,3586 2440,3586
  Bottom Layer w10: 2459.62,3670.62 2459.62,3694.38 2420,3734 2420,3810 2459.62,3849.62 v1(2459.62,4525.38) ; v1(3005,3566) 3005,3346.07 3044.61,3306.46 3044.61,3261.61 3025,3242 3025,3106 3294.1,2836.9 3294.1,2720.9 U1.8@3350,2665
CPU_AD5: U1.6 U5.7 U6.7 | length 3391
  Top Layer w10: v1(2225,4525) 2225,4542.46 2238.54,4556 U6.7@2238.54,4595 ; U5.7@2238.54,3690 2238.54,3750.46 ; v1(2432,2687) 2448,2703 2694.1,2703 2712,2720.9 2799.85,2720.9 2817.75,2703 3412,2703 U1.6@3450,2665
  Bottom Layer w10: v1(2225,4525) 2113,4525 2068,4480 2068,3921 2199.01,3789.99 2199.01,3730.01 ; 2238.54,3750.46 2219.46,3750.46 2199.01,3730.01 ; v1(2432,2687) 2471,2726 2471,2805 2330,2946 2330,3413 2199.01,3543.99 2199.01,3730.01
CPU_AD6: U1.4 U5.8 U6.8 | length 4078.4
  Top Layer w10: 2264.13,3629.13 U5.8@2264.13,3690 ; U6.8@2264.13,4595 2264.13,4503.87 ; v1(2283,4485) 2264.13,4503.87 ; v1(3522,4065) 3076,4065 3017.58,4123.42 3017.58,4217.42 2914,4321 2822,4321 2782,4281 2545,4281 2467,4359 2360.13,4359 2264.13,4455 2264.13,4485 2264.13,4503.87
  Bottom Layer w10: 2264.13,3629.13 2285,3650 2285,4201 2283,4203 v1(2283,4485) ; v1(3522,4065) 3522,3889 3502,3869 3502,3793 3548,3747 3548,3300 3488,3240 3488,2762 3550,2700 U1.4@3550,2665
CPU_AD7: U1.2 U5.9 U6.9 | length 3554.3
  Top Layer w10: U5.9@2289.72,3690 2289.72,3649.28 2300,3639 2352,3639 2372.89,3659.89 2384,3659.89 2425.11,3701 2482,3701 2520,3663 3124,3663 v1(3153,3634) ; U6.9@2289.72,4595 2289.72,4556.28 2366,4480 v1(2366,4428)
  Bottom Layer w10: 2352,3639 2352,3652 2326,3678 2326,4388 v1(2366,4428) ; v1(3153,3634) 3272,3515 3272,3400 3284.9,3387.1 3348,3387.1 3403.9,3443 3432,3443 3475,3400 3475,3360 3412.1,3297.1 3412.1,2640 3425.1,2627 3612,2627 U1.2@3650,2665
CPU_LCS: U1.33 U9.5 | length 1887.7
  Top Layer w10: U9.5@1392.64,2125 1392.64,2267.64 1440,2315 v1(1923,2315) ; v1(2065,2011) 2107,1969 2686,1969 2720,2003 2776.1,2003 2814.1,1965 U1.33@2850,1965
  Bottom Layer w10: v1(1923,2315) 1923,2153 v1(2065,2011)
CPU_MCS0: U1.38 U9.6 | length 1921.7
  Top Layer w10: U9.6@1367.05,2125 1367.05,2080 1379.05,2068 1679,2068 1688,2059 2676,2059 2710,2025 2794.1,2025 2812.1,2007 3018,2007 3026,1999 3026,1909 2982,1865 U1.38@2950,1865
CPU_MCS1: U1.37 U9.7 | length 1944.4
  Top Layer w10: U9.7@1341.46,2125 1341.46,2060 1351.46,2050 1661,2050 1670,2041 1913.29,2041 2004.29,1950 2689,1950 2712,1927 v1(2988,1927)
  Bottom Layer w10: U1.37@2950,1765 2988,1803 v1(2988,1927)
CPU_MCS2: U1.36 U9.8 | length 1687.4
  Top Layer w10: U9.8@1315.87,2125 1315.87,2047.13 1331,2032 1634,2032 1643,2023 1830.57,2023 1851.57,2002 1890.6,2002 1967.37,1925.23 2488.61,1925.23 2510.94,1902.9 2812.1,1902.9 U1.36@2850,1865
CPU_MCS3: U1.35 U9.9 | length 1758.6
  Top Layer w10: U9.9@1290.28,2125 1290.28,2040 1316.28,2014 1625,2014 1638.37,2000.63 1822.81,2000.63 1839.44,1984 1846.37,1984 1929.37,1901 2436,1901 v1(2457,1880)
  Bottom Layer w10: v1(2457,1880) 2572,1765 U1.35@2850,1765
CPU_PCS0: U1.25 U10.8 | length 1139.5
  Top Layer w10: U10.8@2320,3114.13 2426.82,3114.13 2431.64,3118.95 2600,3118.95 2652.4,3066.55 v1(2652.4,2866.7)
  Bottom Layer w10: v1(2652.4,2866.7) 2810,2709.1 2810,2405 U1.25@2850,2365
CPU_PCS1: U1.27 U10.7 | length 1274.7
  Top Layer w10: U10.7@2320,3088.54 2475.54,3088.54 2487.95,3100.95 2560.02,3100.95 v1(2614,3046.97)
  Bottom Layer w10: v1(2614,3046.97) 2667.98,3046.97 2812.1,2902.85 2812.1,2740 2825.1,2727 2843,2727 2887.9,2682.1 2887.9,2337.9 2850,2300 U1.27@2850,2265
CPU_PCS2: U1.28 U10.6 | length 1261.2
  Top Layer w10: U10.6@2320,3062.95 v1(2521.05,3062.95)
  Bottom Layer w10: v1(2521.05,3062.95) 2609.38,2974.62 2609.38,2742.72 2725,2627.1 2760.9,2627.1 2788,2600 2788,2333 2805.9,2315.1 2805.9,2220.9 U1.28@2750,2165
CPU_PCS3: U1.29 U10.5 | length 1454.6
  Top Layer w10: v1(2223,3037.36) U10.5@2320,3037.36 ; v1(2377,2253) 2427.1,2202.9 2812.1,2202.9 U1.29@2850,2165
  Bottom Layer w10: v1(2223,3037.36) 2223,2407 v1(2377,2253)
CPU_PCS4: U1.30 U10.4 | length 1343.5
  Top Layer w10: U10.4@2320,3011.77 2500,3011.77
  Bottom Layer w10: 2500,3011.77 2505.77,3006 2505.77,2509.23 2712,2303 2774.9,2303 2787.9,2290 2787.9,2242.9 2763,2218 2740,2218 2712,2190 2712,2103 U1.30@2750,2065
CPU_PCS5: U1.31 U10.3 | length 1696.5
  Top Layer w10: 2141.18,2986.18 U10.3@2320,2986.18 ; 2154,2314 2215.9,2252.1 2215.9,2192.1 2287.1,2120.9 2794.1,2120.9 U1.31@2850,2065
  Bottom Layer w10: 2141.18,2986.18 2134,2979 2149,2964 2149,2319 2154,2314
CPU_PCS6: U1.32 U10.2 | length 1758.4
  Top Layer w10: U10.2@2320,2960.59 2382.59,2960.59
  Bottom Layer w10: 2382.59,2960.59 2474.85,3052.85 2474.85,3084 2500,3109.15 2610.13,3109.15 2652.4,3066.88 2687.12,3066.88 2888,2866 2888,2720.9 2905.9,2703 2905.9,2327 2888,2309.1 2888,2040 2863,2015 2800,2015 U1.32@2750,1965
CPU_UCS: U1.34 U9.4 | length 3971.7
  Top Layer w10: U9.4@1418.23,2125 1418.23,2215.23 1460,2257 1940,2257 1961,2278 1961,2400.19 1940,2421.19 1386.19,2421.19 1106,2141 1106,1817 1160,1763 2336.54,1763 2430,1669.54 2480,1669.54 2501.58,1691.12 2501.58,1863.1 2503.48,1865 U1.34@2750,1865
D0: U3.13 U4.13 U5.18 U12.5 U14.19 U15.16 U16.18 U19.5 U19.15 U20.2 | length 14767.6
  Top Layer w10: U5.18@2136.18,3963.62 2136.18,4216.18 2165,4245 2673,4245 2690.9,4262.9 2820,4262.9 2860.1,4303 2903,4303 2916,4290 2916,4251 v1(2972,4195) ; U4.13@3310,4325 3270,4285 v1(3006,4285) 3116,4175 3502,4175 3665,4012 v1(3726,4012) ; U3.13@3320,6045 3715,5650 4209.72,5650 4219.72,5660 U15.16@4219.72,5706.3 ; U14.19@3650,3692.64 3720.64,3692.64 3721,3693 v1(3754,3693) ; v1(4015,3744) 4424.54,3744 4477.54,3691 ; v1(5454,3098) 5440.59,3111.41 U20.2@5440.59,3188 5440.59,3240 5394.59,3286 4988,3286 4983,3291 4867.54,3291 4772.36,3386.18 U16.18@4721.38,3386.18 4666,3386.18 4538.5,3513.68 4538.5,3630.04 4477.54,3691 ; v1(5682,2835) 5699,2852 5836.74,2852 5851,2866.26 U19.5@5905,2866.26 ; v1(5784,2654) 5799.41,2669.41 U19.15@5905,2669.41 ; v1(6696,1357) 6760.2,1292.8 U12.5@6858.46,1292.8 ; v1(6855,3691) 4477.54,3691
  Bottom Layer w10: v1(2972,4195) v1@2986,4209 ; v1(3006,4285) 3006,4229 v1@2986,4209 ; U3.13@3320,6045 2986,5711 v1@2986,4209 ; v1(3726,4012) 3764,3974 3764,3791 3744,3771 3744,3703 v1(3754,3693) 3964,3693 v1(4015,3744) ; v1(5454,3098) 5454,2599 5538,2515 5770,2515 5813,2558 5813,2625 v1@5786,2652 ; v1(5682,2835) 5682,2670 5700,2652 5784,2652 v1@5786,2652 ; v1(5784,2654) v1@5786,2652 ; v1(6696,1357) 6696,2847 6881,3032 6881,3665 v1(6855,3691)
D1: U3.14 U4.14 U5.17 U14.18 U16.17 U19.6 U19.16 U20.3 | length 10530.5
  Top Layer w10: U5.17@2161.77,3963.62 2161.77,3920 2183.77,3898 2213.01,3898 2253.27,3857.74 2253.27,3850 2265.57,3837.69 2273.31,3837.69 2277.76,3833.25 2277.76,3793 2299.73,3771.03 2339.98,3771.03 2355.51,3755.5 2398.5,3755.5 2420,3734 2481.12,3734 2534.12,3681 3233,3681 v1(3253,3701) 3273,3681 3377,3681 3414.23,3718.23 U14.18@3650,3718.23 ; v1(3211,4422) 3231,4422 3234,4425 U4.14@3310,4425 3581,4154 v1(4772,4154) ; U16.17@4721.38,3411.77 v1(4811,3411.77) 4912.77,3310 5424,3310 5466.18,3267.82 U20.3@5466.18,3188 ; v1(5775,3264) 5775,3166 v1(5976,2965) ; U19.16@5905,2649.73 5961.73,2649.73 5970,2658 ; U19.6@5905,2846.58 5975.58,2846.58
  Bottom Layer w10: v1(3253,3701) 3266.9,3687.1 3335,3687.1 3347.9,3700 3347.9,3750 3335,3762.9 ; U3.14@3320,6145 3370.9,6094.1 3370.9,5845.9 3249,5724 3249,4512.23 3233.9,4497.13 ; v1(4772,4154) 4913,4013 ; v1(4811,3411.77) 4811,3960 4864,4013 4913,4013 ; v1(5775,3264) 5656.8,3264 5598.8,3206 5380,3206 5312,3138 5200,3138 5153,3185 5153,3314 4925,3542 4925,4001 4913,4013 ; 5970,2658 5934,2694 5934,2804.58 ; 5975.58,2846.58 5975.58,2846.15 5934,2804.58 ; v1(5976,2965) 5934,2923 5934,2804.58 ; v1@3196,4407 v1(3211,4422) 3233.9,4444.9 3233.9,4497.13 ; v1@3196,4407 3196,4459.23 3233.9,4497.13 ; v1@3196,4407 3196,3972.2 3196.1,3972.1 3196.1,3911.1 3249,3858.2 3249,3787 3271,3765 3317,3765 ; 3317,3765 3332.9,3765 3335,3762.9 ; 3317,3765 3319.1,3762.9 3335,3762.9
D2: U3.15 U4.15 U5.16 U14.17 U16.16 U19.8 U19.17 U20.4 | length 10472.7
  Top Layer w10: U5.16@2187.36,3963.62 2187.36,4044.36 2317,4174 2809,4174 2938,4045 3226,4045 v1(3252,4019) ; U4.15@3310,4525 v1(3443,4525) ; 3462.94,3772 3491.13,3743.82 U14.17@3650,3743.82 ; v1(4687,4346) 4608,4425 3689,4425 3678,4425 ; U16.16@4721.38,3437.36 4776,3437.36 4820.64,3482 v1(4868,3482) ; 4868,3063 4871,3060 5421,3060 v1(5492,2989) 5492,3156 5491.77,3156 U20.4@5491.77,3188 ; v1(5775,2596) 5709,2596 5692,2613 ; U19.17@5905,2630.04 5848.04,2630.04 5831,2613 5692,2613 ; U19.8@5905,2807.21 5863,2807.21 5836.21,2834 5740,2834 5715.39,2809.39 5715.39,2791.7 5665,2741.31 5665,2640 5692,2613 ; v1(3443,4525) 3578,4525 3678,4425 ; v1(3443,4525) 3543,4425 3678,4425
  Bottom Layer w10: v1(3252,4019) 3272.1,4039.1 3272.1,4448.1 3310,4486 U4.15@3310,4525 ; U3.15@3320,6245 3388.9,6176.1 3388.9,5983.2 3396,5976.1 3396,5249.9 3428.9,5217 3428.9,4539.1 v1(3443,4525) ; 3462.94,3772 3479,3788.06 3479,4149 3635.28,4305.28 3635.28,4371.28 3689,4425 ; v1(4687,4346) 4699,4334 4699,3232 4868,3063 v1(4868,3482) ; v1(5492,2989) 5554,2927 5554,2599 5620,2533 5712,2533 v1(5775,2596)
D3: U3.17 U4.17 U5.15 U14.16 U16.15 U19.9 U19.19 U20.5 | length 9100.3
  Top Layer w10: U5.15@2212.95,3963.62 2212.95,4041.95 2252,4081 2625,4081 v1(2645,4101) ; 2641.1,3969.1 2964.9,3969.1 3047,3887 3469.12,3887 3501.12,3919 3698.8,3919 3707.8,3910 3729,3910 3764,3875 3764,3813.41 3720,3769.41 ; U14.16@3650,3769.41 3720,3769.41 ; v1(3782,3753) 3765.59,3769.41 3720,3769.41 ; v1(4073.5,3816.5) 4110,3780 4361.09,3780 4421.09,3840 4421.09,3889.09 4456,3924 v1(4496,3924) ; v1(4585,3556) 4637,3556 4661,3580 ; U16.15@4721.38,3462.95 4678.05,3462.95 4661,3480 4661,3580 ; v1(4867,3592) 4673,3592 4661,3580 ; v1(5009,2979) 5426,2979 5459,2946 5512.05,2946 5540,2973.95 5556.05,2973.95 ; U20.5@5517.36,3188 5517.36,3092.64 5530,3080 5530,3000 5556.05,2973.95 ; v1(5834,2769) 5852.52,2787.52 U19.9@5905,2787.52 5952,2787.52 6000.48,2836 6060,2836 6073.2,2822.8 6073.2,2646.8 v1(6084,2636) ; v1(5834,2984) 5823.95,2973.95 5556.05,2973.95 ; U19.19@5905,2590.67 v1(5990,2590.67)
  Bottom Layer w10: 2641.1,3969.1 2645,3973 v1(2645,4101) 2672.1,4128.1 2672.1,4245.1 2714,4287 2734.9,4287 2747.9,4300 2747.9,4587.1 U4.17@2710,4625 2710,4786.1 2687.1,4809 2687.1,5065.1 2752.9,5130.9 2752.9,5351 2770.9,5369 2770.9,5478 2752.9,5496 2752.9,5558.63 2731.43,5580.09 2700,5580.09 2669,5611.09 2669,6056.54 2651.1,6074.44 2651.1,6276.1 U3.17@2720,6345 ; v1(3782,3753) 3814,3785 4042,3785 v1(4073.5,3816.5) ; v1(4496,3924) 4496,3645 v1(4585,3556) ; v1(4867,3592) 4906,3553 4906,3082 v1(5009,2979) ; v1(5834,2769) v1(5834,2984) ; v1(5990,2590.67) 5990,2520 6010,2500 6056,2500 6084,2528 v1(6084,2636)
D4: U3.18 U4.18 U5.14 U14.15 U19.10 U19.20 U20.6 | length 11150.6
  Top Layer w10: U5.14@2238.54,3963.62 2238.54,3902.46 2363,3778 2452,3778 2504,3778 2517,3765 2748,3765 2784,3729 2836.53,3729 2876.53,3769 3394.48,3769 3420.48,3795 U14.15@3650,3795 ; v1(5578,3011.95) 5548,3041.95 5548,3098 5542.95,3103.05 U20.6@5542.95,3188 5542.95,3360.95 5563,3381 5735,3381 v1(5777,3423) ; v1(5674,2571) 5687,2558 5793,2558 5805.99,2570.99 U19.20@5905,2570.99 5950.51,2570.99 5969.49,2552 6016,2552 v1(6028,2540) ; v1(5777,4590) 3388.79,4590 3365.9,4567.11 3271.11,4567.11 3229,4525 U4.18@2710,4525 ; U19.10@5905,2767.84 5972.16,2767.84 v1(5990,2750) ; U4.18@2710,4525 2585,4650 v1(2481,4650) 2606,4525 U4.18@2710,4525
  Bottom Layer w10: 2452,3778 2458,3772 2491,3805 2491,3983.47 2498,3990.47 2498,4633 v1(2481,4650) 2481,6200 2659,6378 2740,6378 2753,6365 2753,6278 U3.18@2720,6245 ; v1(5578,3011.95) 5578,2667 v1(5674,2571) ; v1(5777,3423) v1(5777,4590) ; v1(5990,2750) 6010,2750 6028,2732 v1(6028,2540)
D5: U3.19 U4.19 U5.13 U14.14 U19.12 U19.21 U20.7 | length 9884.1
  Top Layer w10: U5.13@2264.13,3963.62 2264.13,3920 2289.72,3894.41 2289.72,3876.73 2355.46,3811 2498,3811 2522,3787 v1(2806,3787) ; 2832,4388 2795,4425 ; 3549.59,3820.59 U14.14@3650,3820.59 ; v1(5430,4290) 3690,4290 v1(3674,4306) 3642.52,4337.48 3523.52,4337.48 3398,4463 2972,4463 ; 5568.54,3275.54 U20.7@5568.54,3188 5568.54,3100.13 5622.67,3046 v1(5758,3046) ; v1(5624,2704) 5636,2692 5636,2547 5650,2533 5804,2533 5822.3,2551.3 U19.21@5905,2551.3 ; v1(5758,2790.47) 5820,2728.47 U19.12@5905,2728.47 ; 2795,4425 2972,4425 2972,4463 ; 2795,4425 U4.19@2710,4425 2748,4463 2972,4463
  Bottom Layer w10: U3.19@2720,6145 2832,6033 2832,4247 2860,4219 2860,3981 2806,3927 v1(2806,3787) ; 3549.59,3820.59 3580,3851 3580,4178.02 3656.41,4254.42 3656.41,4288.41 v1(3674,4306) ; v1(5430,4290) 5622,4098 5622,3309 5592,3279 5572,3279 5568.54,3275.54 ; v1(5624,2704) 5624,3120 5646,3142 5681,3142 5758,3065 v1(5758,3046) v1(5758,2790.47)
D6: U3.20 U4.20 U5.12 U14.13 U19.13 U19.23 U20.8 | length 10204.8
  Top Layer w10: U5.12@2289.72,3963.62 2289.72,3919.87 2373.59,3836 2645,3836 2672,3863 2687,3863 ; v1(2916,3931) 2850,3931 2794,3875 ; v1(2928,4373) 2894,4339 2776,4339 2762,4325 U4.20@2710,4325 2672,4363 2672,4460 2697,4485 3407,4485 3530,4362 4613,4362 4667,4308 4713,4308 4752,4347 v1(5485,4347) ; U14.13@3650,3846.18 3611.82,3846.18 3607,3851 3523,3851 3517,3845 3439,3845 3381,3787 2866,3787 2790,3863 2782,3863 ; v1(5660,3305) 5606.54,3251.54 5606.54,3246.54 5594.13,3234.13 U20.8@5594.13,3188 5594.13,3109.87 5640,3064 5697,3064 5720,3087 5788,3087 v1(5825,3050) ; v1(5762,2730) 5782,2710 5823.28,2710 5824.5,2708.78 U19.13@5905,2708.78 ; v1(5827,2494) 5844.93,2511.93 U19.23@5905,2511.93 ; 2687,3863 2782,3863 ; 2687,3863 2699,3875 2794,3875 ; 2782,3863 2794,3875
  Bottom Layer w10: U3.20@2720,6045 2669.1,6095.9 2669.1,6185 2680,6195.9 2832.1,6195.9 2908,6120 2908,4393 v1(2928,4373) 2916,4361 v1(2916,3931) ; v1(5485,4347) 5660,4172 v1(5660,3305) ; v1(5762,2730) 5796,2696 ; v1(5825,3050) 5796,3021 5796,2696 ; v1(5827,2494) 5827,2536 5831,2540 5831,2661 5796,2696
D7: U3.21 U4.21 U5.11 U14.12 U19.14 U19.24 U20.9 | length 10085.9
  Top Layer w10: U5.11@2315.32,3963.62 2315.32,4004.32 2374,4063 2720,4063 2767,4110 v1(2767,4136) ; U4.21@2710,4225 2838,4225 v1(2878,4265) ; v1(2878,3863) 3486.15,3863 3494.92,3871.77 U14.12@3650,3871.77 ; 2878,4558 2878,4574 2890,4586 3333.9,4586 3370.9,4623 5724,4623 v1(5739,4638) ; v1(5662,3104) 5619.72,3146.28 U20.9@5619.72,3188 5619.72,3233.03 5625,3238.3 5685.7,3238.3 v1(5701,3223) ; v1(5720,2690) 5722,2692 5806.5,2692 5809.4,2689.1 U19.14@5905,2689.1 5978.9,2689.1 6028,2640 6028,2598 6066,2560 6066,2522.34 6035.9,2492.25 U19.24@5905,2492.25
  Bottom Layer w10: U4.21@2710,4225 2710,4193 v1(2767,4136) ; U3.21@2720,5945 2753,5978 2753,6059 2687.1,6124.9 2687.1,6165 2700,6177.9 2733.68,6177.9 2878,6033.58 2878,4558 v1(2878,4265) v1(2878,3863) ; v1(5662,3104) 5720,3046 v1(5720,2690) ; v1(5701,3223) 5797,3223 5813,3239 5813,3291 5739,3365 v1(5739,4638)